# EAGLE board POWERSUPPLAY (EAGLE 9.6.2)
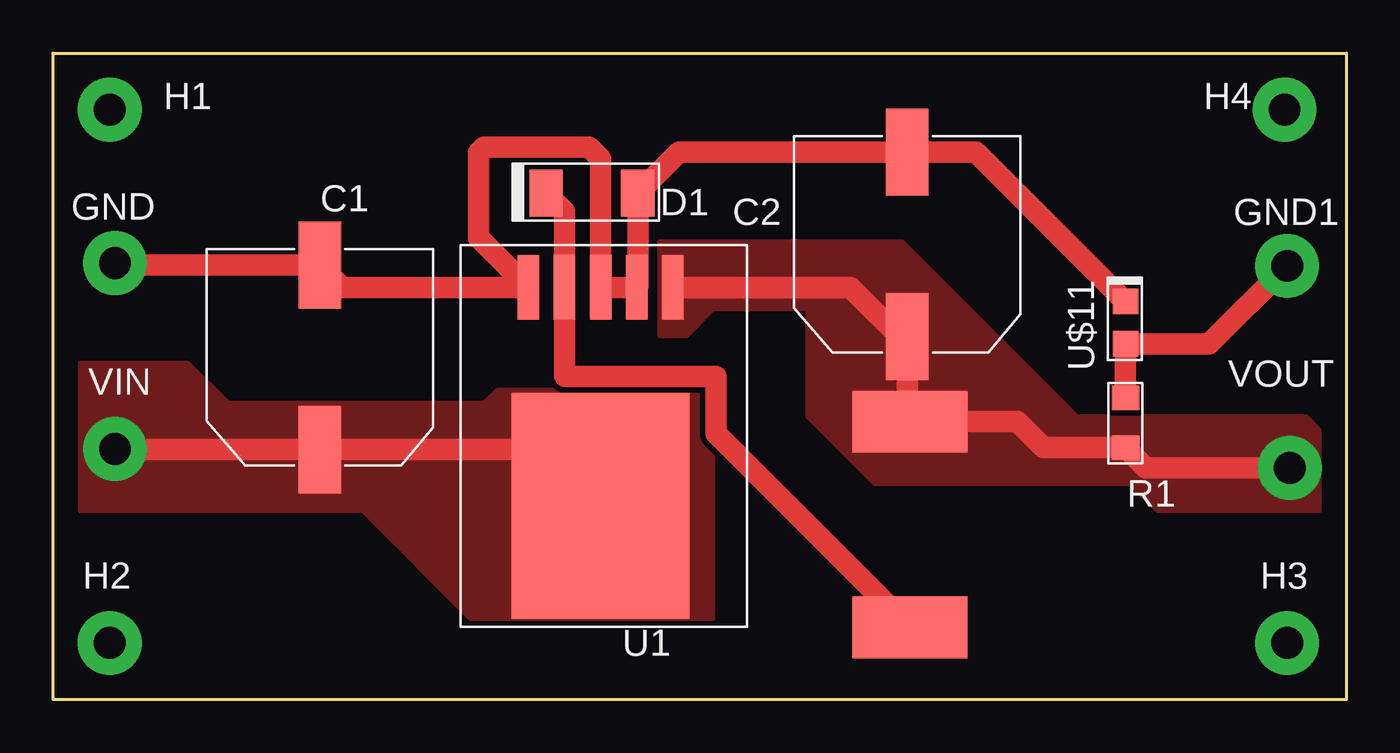
[diagram p0: board, top side]
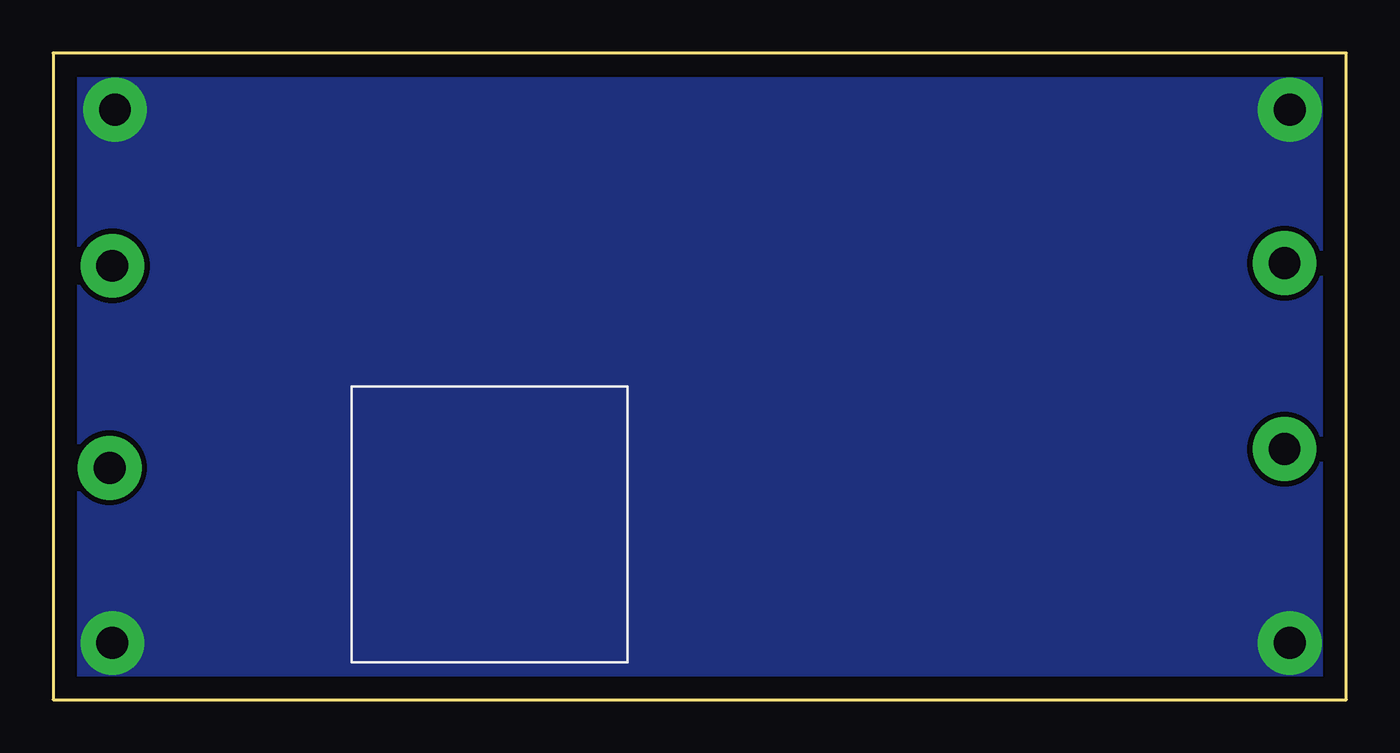
[diagram p1: board, bottom side, seen from below]

Size 60.96 x 30.48 mm. Coordinates in mm from the lower left corner, seen from the top.
Outline: 0,0 0,30.48 60.96,30.48 60.96,0 0,0
Copper layers (1*16): Top 0.035mm / dielectric 1.5mm / Bottom 0.035mm
Design rules "default *": minimum track width 10mil, minimum drill 0.35mm, track to track 10mil, track to pad 10mil, pad to pad 10mil, via to via 10mil, smd to smd 10mil, copper to edge 40mil, drill to drill 6mil, minimum pad ring 10mil, minimum via ring 8mil, stop-mask expansion 4mil, vias tented up to drill 0mil, thermal gap 10mil

## Footprints (pad centres in the part's own frame; a part is rotated, then mirrored left to right if it is on the bottom)
00CAP = smd 2 x 4.1: 1 0,-4.35; 2 0,4.35
00_1N5822 = smd 1.57 x 2.22: 1 0,0; 2 4.32,0
00PAD = drill 1.5 pad 3: 1 0,0
01INDUCTOR = smd 2.9 x 5.4: 1 -4.85,0; 2 4.85,0
00RES = smd 1.15 x 1.3: 1 0,0; 2 2.35,0
00LM2576 = smd 3.05 x 1.016: 1 0,0; 2 0,1.702; 3 0,3.404; 4 0,5.106; 5 0,6.808 | smd 10.66 x 8.38: 6 -10.302,3.404
0805_LED = smd 1.2 x 1.2: 1 -2.54,2.54; 2 -0.54,2.54

## Placement (x,y rotation side)
C1  100uF  [00CAP]  12.57,16.13 0 top
C2  1000uF  [00CAP]  40.26,21.46 0 top
D1  00_1N5822  [00_1N5822]  27.56,23.88 180 top
GND  00PAD  [00PAD]  2.92,20.57 90 top
GND1  MH_HOLE  [00PAD]  58.17,20.45 0 top
H1  MH_HOLE  [00PAD]  2.67,27.81 0 top
H2  MH_HOLE  [00PAD]  2.67,2.67 0 top
H3  MH_HOLE  [00PAD]  58.17,2.67 0 top
H4  MH_HOLE  [00PAD]  58.04,27.81 0 top
L1  100uH  [01INDUCTOR]  40.39,8.26 90 top
R1  00RES  [00RES]  50.55,14.22 270 top
U1  00LM2576  [00LM2576]  29.21,19.43 90 top
U$11  00LED  [0805_LED]  53.09,19.3 90 top
VIN  00PAD  [00PAD]  2.92,11.81 0 top
VOUT  MH_HOLE  [00PAD]  58.29,10.92 0 top

## Library data of the parts
C1 C2 = 00CAP
D1 = 00_1N5822
GND GND1 H1-H4 VIN VOUT = 00PAD
L1 = 01INDUCTOR
R1 = 00RES
U1 = 00LM7576
U$11 = 00LED

## Nets
5V: C2.1 L1.2 R1.2 U1.1 VOUT.1
GND: H1.1 H2.1 H3.1 H4.1
N$1: D1.2 L1.1 U1.4
N$3: C1.2 C2.2 D1.1 GND.1 U1.2 U1.3 U1.5 U$11.2
N$5: GND1.1 R1.1 U$11.1
VIN: C1.1 U1.6 VIN.1

## Tracks (layer width: path | path; a pad name or v marks a point on that pad's centre or on a via)
5V
  Top 1.016: 50.61,11.81 R1.2 | 40.39,13.61 L1.2 | VOUT.1 51.5,10.92 R1.2 | R1.2 46.67,11.87 45.44,13.11 L1.2 | L1.2 40.26,13.23 40.26,16.76 | 40.26,16.76 C2.1 | U1.1 37.59,19.43 40.26,16.76
  pour Top (no thermals): 59.69,12.7 59.05,13.34 48.26,13.34 40.01,21.59 29.84,21.59 28.57,21.59 28.57,17.14 29.84,17.14 31.11,18.41 35.56,18.41 35.56,13.34 38.1,10.79 38.73,10.16 50.8,10.16 52.07,8.89 59.69,8.89
GND
  pour Bottom (no thermals): 60.33,29.84 60.33,0.64 0.64,0.64 0.64,29.84
N$1
  Top 1.016: U1.4 24.1,18.44 | D1.2 24.1,23.01 U1.4 | L1.1 31.24,12.55 31.24,15.24 24.13,15.24 24.1,15.27 U1.4
N$3
  Top 1.016: 12.48,20.57 C1.2 | 40.26,25.37 C2.2 | C1.2 13.08,20.48 | C2.2 29.5,25.81 D1.1 27.56,19.48 U1.2 U1.3 25.81,25.5 25.27,26.04 20.32,26.04 20.07,25.78 20.07,21.77 U1.5 13.62,19.43 C1.2 | U$11.2 43.5,25.81 C2.2 | C1.2 3.02,20.48 GND.1
N$5
  Top 1.016: GND1.1 54.48,16.76 U$11.1 R1.1
VIN
  Top 1.016: 12.54,11.81 C1.1 | C1.1 23.16,11.78 U1.6 | C1.1 2.95,11.78 VIN.1
  pour Top (no thermals): 30.48,14.61 20.95,14.61 20.32,13.97 8.89,13.97 8.26,13.97 6.35,15.88 1.27,15.88 1.27,8.89 14.61,8.89 19.68,3.81 31.11,3.81 31.11,11.43 30.48,12.06